# Altium PCB SteeringWheelBoard.PcbDoc
Units mil, origin at the board's own origin, x right, y up, seen from the top; angles counter-clockwise.
Board outline 2850 x 1785 mil, 2 copper layers (Top Layer, Bottom Layer); 13 components, 14 nets, 76 pads, 0 vias.
Unrouted connection lines stored in the file: 57.
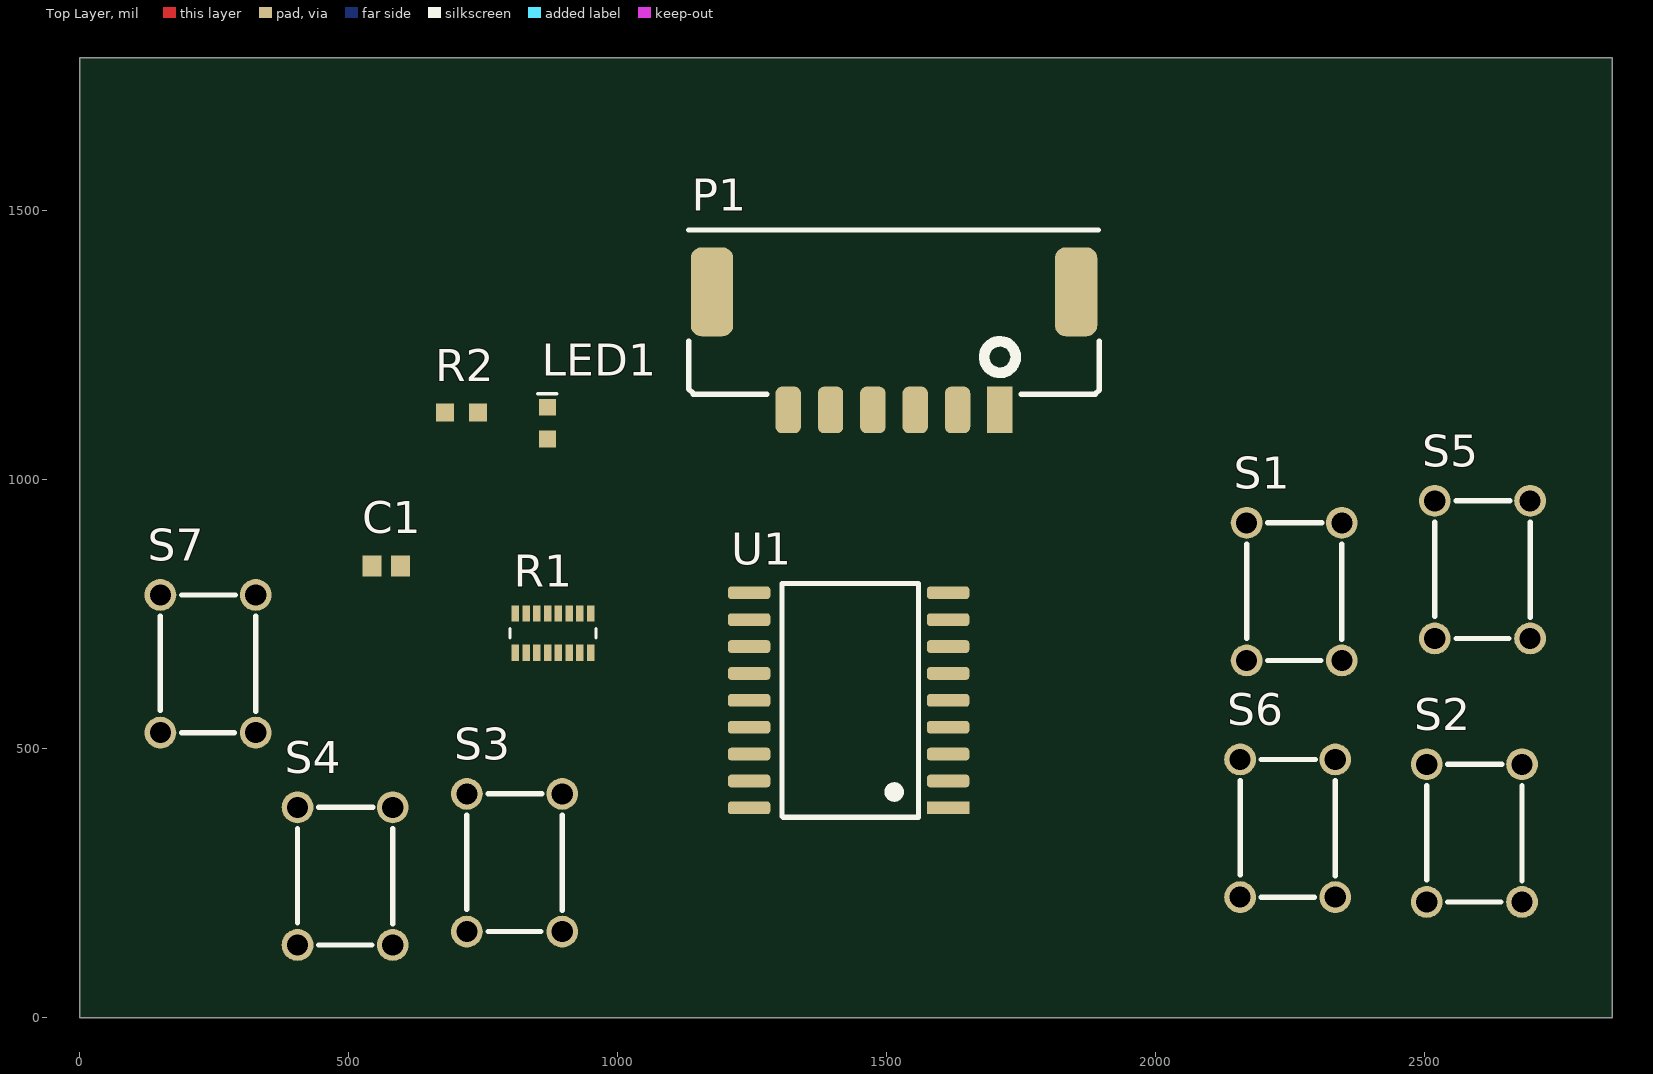
[diagram p0: Top Layer view]
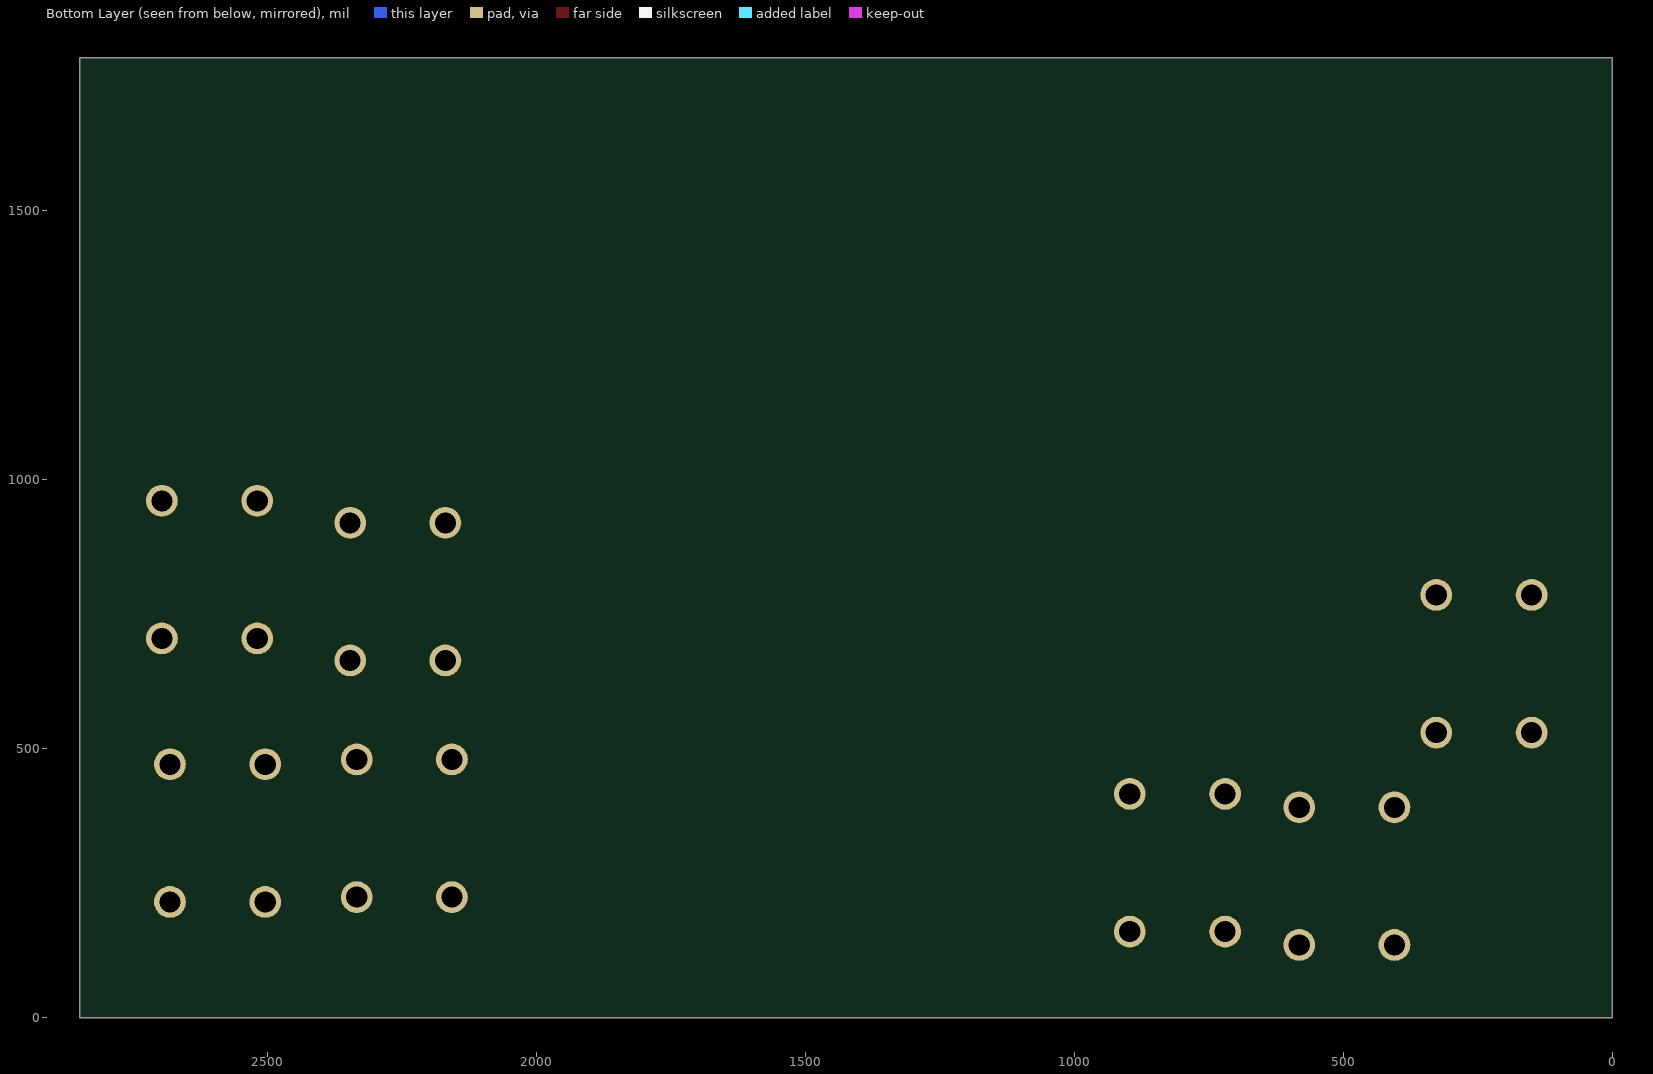
[diagram p1: Bottom Layer view, seen from below]

## Layer stack, top to bottom
Top Solder: solder mask 0.4, Solder Resist, Dk 3.5
Top Layer: signal copper 1.4
Dielectric 1: dielectric 12.6, FR-4, Dk 4.8
Bottom Layer: signal copper 1.4
Bottom Solder: solder mask 0.4, Solder Resist, Dk 3.5

## Board outline
0,0 2850,0 2850,1785 0,1785

## Design rules (kind name [scope] priority, off if disabled: settings)
Clearance [All] p1: gap=10 ignorepadtopadclearanceinfootprint=FALSE except(0: Arc-Hole Track-Hole SMDPad-Hole THPad-Hole Via-Hole Fill-Hole Poly-Hole Region-Hole Text-Hole; 6: Arc-SMDPad Track-SMDPad SMDPad-SMDPad)
PolygonConnect [All] p1: connectstyle=Relief reliefconductorwidth=10 reliefentries=4 polygonreliefangle="90 Angle" airgapwidth=10
RoutingVias [All] p1: holewidth=28 width=50 viastyle="Through Hole" minholewidth=28 minwidth=50 maxholewidth=28 maxwidth=50
SolderMaskExpansion [All] p1: expansion=4
Width [All] p1: maxlimit=10 minlimit=10 preferedwidth=10
30 further rules are at their usual default settings.

## Components (designator, comment, footprint, x,y, rotation, side; value= is the part's Value field where it differs from the comment)
C1 "CAP CER 0.1UF 50V 10% X7R 0603" "CAP, 0603" 570,840 r0 top
LED1 "LED RED CLEAR 2V 0603" LED_0603 870.39,1077.91 r90 top
P1 "DURA-CLIK" "CONN, 6POS DURA-CLIK VERT" 1711.22,1130 r180 top
R1 "RES ARRAY 10K OHM 5% 8RES" "RES ARRAY, 8 POS 1506" 880,715 r270 top value=Value
R2 "RES 510 OHM 5% 1/10W 0603" "RES, 0603" 710,1125 r0 top
S1 "SPST" "SW SPST-NO 6x6mm Via Hole" 2170,664.09 r0 top
S2 "SPST" "SW SPST-NO 6x6mm Via Hole" 2505,215 r0 top
S3 "SPST" "SW SPST-NO 6x6mm Via Hole" 720,160 r0 top
S4 "SPST" "SW SPST-NO 6x6mm Via Hole" 405,135 r0 top
S5 "SPST" "SW SPST-NO 6x6mm Via Hole" 2520,705 r0 top
S6 "SPST" "SW SPST-NO 6x6mm Via Hole" 2157.83,224.09 r0 top
S7 "SPST" "SW SPST-NO 6x6mm Via Hole" 150,530 r0 top
U1 "MCP23008" "IC 18SOIC" 1615,390 r90 top

## Footprints (in the part's own frame and the unit in brackets; to place one, negate y for a bottom-side part, rotate by r counter-clockwise, add the part's x,y. Pads: shape width x height; smd on the part's side, far side on the other; paste and mask are expansions set on the pad)
"CAP, 0603" [mm] "Chip Capacitor, 2-Leads, Body 1.60x0.81mm, IPC Medium Density"
  rect 0.9x1 smd mask+0.076: 1(-0.675,0) 2(0.675,0)
  body extent -0.87,-0.48 0.87,0.48, height 0.9
"CONN, 6POS DURA-CLIK VERT" [mm]
  rect 1.2x2.2 smd: 1(0,0)
  rrect50% 1.2x2.2 smd: 2(2,0) 3(4,0) 4(6,0) 5(8,0) 6(10,0)
  rrect50% 2x4.2 smd: 7(-3.6,-5.58) 7(13.6,-5.58)
  silkscreen extent -4.7,-8.5 14.7,-0.75, body extent -4.35,-8.54 14.25,0.61, height 7.97
"IC 18SOIC" [mm]
  rect 0.6x2 smd: 1(0,0)
  rrect50% 0.6x2 smd: 2(1.27,0) 3(2.54,0) 4(3.81,0) 5(5.08,0) 6(6.35,0) 7(7.62,0) 8(8.89,0) 9(10.16,0) 10(10.16,9.4) 11(8.89,9.4) 12(7.62,9.4) 13(6.35,9.4) 14(5.08,9.4) 15(3.81,9.4) 16(2.54,9.4) 17(1.27,9.4) 18(0,9.4)
  silkscreen extent -0.45,1.4 10.6,7.85, body extent -0.62,-0.38 10.72,9.78, height 2
LED_0603 [mm]
  rect 0.8x0.8 smd: 1(-0.05,0.01) 2(1.45,0.01)
  silkscreen extent 2.09,-0.43 2.09,0.48, body extent -0.1,-0.39 1.5,0.41, height 0.55
"RES ARRAY, 8 POS 1506" [mil]
  rect 30x14 smd: 1(-36.5,70) 2(-36.5,50) 3(-36.5,30) 4(-36.5,10) 5(-36.5,-10) 6(-36.5,-30) 7(-36.5,-50) 8(-36.5,-70) 9(36.5,-70) 10(36.5,-50) 11(36.5,-30) 12(36.5,-10) 13(36.5,10) 14(36.5,30) 15(36.5,50) 16(36.5,70)
  silkscreen extent -9,-80 9,80, body extent -15,-80 15,80, height 10
"RES, 0603" [mm] "Chip Resistor, 2-Leads, Body 1.60x0.80mm, IPC Medium Density"
  rect 0.85x0.85 smd: 1(-0.775,0) 2(0.775,0)
  body extent -0.8,-0.4 0.8,0.4, height 0.55
"SW SPST-NO 6x6mm Via Hole" [mm]
  round 1.5 hole 1: 1(0,0) 1(0,6.5) 2(4.5,0) 2(4.5,6.5)
  silkscreen extent 0,0 4.5,6.5

## Part data
C1: "0.10µF ±10% 50V Ceramic Capacitor X7R 0603 (1608 Metric)", Capacitance=0.1µF, Manufacturer 1="AVX Corporation", Manufacturer Part Number 1=06035C104KAT2A, Operating Temperature="-55°C ~ 125°C", Package / Case="0603 (1608 Metric)", Ratings=-, Supplier Part Number 1=478-5052-1-ND, Temperature Coefficient=X7R, Tolerance=±10%, Voltage=50V, ComponentLink1Description=http://datasheets.avx.com/X7RDielectric.pdf, ComponentLink1URL=http://datasheets.avx.com/X7RDielectric.pdf, Height - Seated (Max)=-, Lead Spacing=-, Lead Style=-, Mounting Type="Surface Mount, MLCC", Packaging="Cut Tape (CT)", Part Status=Active, Size / Dimension="0.063\" L x 0.032\" W (1.60mm x 0.81mm)", Supplier 1=Digi-Key, Thickness (Max)="0.035\" (0.90mm)"
LED1: "Red 631nm LED Indication - Discrete 2V 0603 (1608 Metric)", Color=Red, Current - Test=20mA, Lens Color=Colorless, Manufacturer="Wurth Electronics Inc.", Manufacturer Part Number=150060RS75000, Millicandela Rating=250mcd, Package / Case="0603 (1608 Metric)", Supplier Device Package=0603, Supplier Part Number 1=732-4978-1-ND, Voltage - Forward (Vf) (Typ)=2V, Category=Optoelectronics, ComponentLink1Description=http://katalog.we-online.de/led/datasheet/150060RS75000.pdf, ComponentLink1URL=http://katalog.we-online.de/led/datasheet/150060RS75000.pdf, Features=-, Height (Max)=0.80mm, Lens Style/Size="Rectangle with Flat Top, 1.10mm x 0.70mm", Lens Transparency=Clear, Mounting Type="Surface Mount", Packaging="Cut Tape (CT)", Part Status=Active, Pricing 1="1=0.21, 100=0.1617, 500=0.13964 (CAD)", RoHS="RoHS Compliant", Size / Dimension="1.60mm L x 0.80mm W", Stock 1=35521, Supplier 1=Digi-Key, Viewing Angle=140°, Wavelength - Dominant=625nm, Wavelength - Peak=630nm
P1: library part "CONN 6POS DURA-CLIK 0.079\"", "6 Positions Header, Shrouded Connector 0.079\" (2.00mm) Surface Mount, Vertical Tin", Current Rating=-, Insulation Color=Natural, Manufacturer=Molex, Manufacturer Part Number=5600200820, Supplier Part Number 1=WM10866CT-ND, Applications="Automotive, Industrial", Category="Connectors, Interconnects", ComponentLink1Description=http://www.molex.com/pdm_docs/sd/5600200220_sd.pdf, ComponentLink1URL=http://www.molex.com/pdm_docs/sd/5600200220_sd.pdf, Connector Type=Header, Contact Finish - Mating=Tin, Contact Finish - Post=Tin, Contact Finish Thickness - Mating=-, Contact Finish Thickness - Post=-, Contact Length - Mating=-, Contact Length - Post=-, Contact Material="Copper Alloy", Contact Shape=Square, Contact Type="Male Pin", Fastening Type="Latch Lock", Features="Solder Retention", Ingress Protection=-, Insulation Height="0.315\" (8.00mm)", Insulation Material="Polyamide (PA), Nylon", Mated Stacking Heights=9.3mm, Material Flammability Rating=-, Mounting Type="Surface Mount", Number of Positions=6, Number of Positions Loaded=All, Number of Rows=1, Operating Temperature=-, Overall Contact Length=-, Packaging="Cut Tape (CT)", Part Status=Active, Pitch - Mating="0.079\" (2.00mm)", Pricing 1="1=1.76, 10=1.542, 25=1.4512, 50=1.391, 100=1.3305, 250=1.20956 (CAD)", RoHS="RoHS Compliant", Row Spacing - Mating=-, Shrouding="Shrouded - 4 Wall", Stock 1=3826, Style="Board to Cable/Wire", Supplier 1=Digi-Key, Termination=Solder, Voltage Rating=-
R1: library part "RES ARRAY 10K OHM 5% 8RES EXB-2HV103JV", "RES ARRAY SMD 10K 5% 62.5mW 1506", Manufacturer="Panasonic Electronic Components", Manufacturer_Part_Number=EXB-2HV103JV, Operating Temperature="-55°C ~ 125°C", Package / Case="1506, Convex, Long Side Terminals", Power Per Element=62.5mW, Resistance (Ohms)=10k, Supplier Device Package=1506, Supplier Part Number 1=Y1103CT-ND, Temperature Coefficient=±200ppm/°C, Tolerance=±5%, Applications="Automotive AEC-Q200", C="Copyright (C) 2015 Accelerated Designs. All rights reserved", Category=Resistors, Circuit Type=Isolated, ComponentLink1Description=https://industrial.panasonic.com/cdbs/www-data/pdf/AOC0000/AOC0000C14.pdf, ComponentLink1URL=https://industrial.panasonic.com/cdbs/www-data/pdf/AOC0000/AOC0000C14.pdf, Copyright="Copyright (C) 2015 Accelerated Designs. All rights reserved", Height - Seated (Max)="0.022\" (0.55mm)", Manufacturer Part Number=EXB-2HV103JV, Mounting Type="Surface Mount", Packaging="Cut Tape (CT)", Part Status=Active, Pricing 1="1=0.43, 10=0.373, 25=0.2712, 50=0.1964, 100=0.1456, 250=0.11176, 500=0.08806, 1000=0.06096 (CAD)", RoHS="RoHS Compliant", Size / Dimension="0.150\" L x 0.063\" W (3.80mm x 1.60mm)", Stock 1=152779, Supplier 1=Digi-Key, Vendor=Panasonic
R2: "RES SMD 510 OHM 5% 1/10W 0603", Manufacturer 1=Yageo, Manufacturer Part Number 1=RC0603JR-07510RL, Operating Temperature="-55°C ~ 155°C", Package / Case="0603 (1608 Metric)", Power=1/10W, Resistance=510, Supplier Device Package=0603, Supplier Part Number 1=311-510GRCT-ND, Temperature Coefficient=±100ppm/°C, Tolerance=±5%, ComponentLink1Description=http://www.yageo.com/documents/recent/PYu-RC_Group_51_RoHS_L_7.pdf, ComponentLink1URL=http://www.yageo.com/documents/recent/PYu-RC_Group_51_RoHS_L_7.pdf, Composition="Thick Film", Failure Rate=-, Height - Seated (Max)="0.022\" (0.55mm)", Packaging="Cut Tape (CT)", Part Status=Active, Size / Dimension="0.063\" L x 0.031\" W (1.60mm x 0.80mm)", Supplier 1=Digi-Key
S1 S2 S3 S4 S5 S6 S7: library part "SW SPST-NO 15VDC@0.02A via hole", "Switch Tactile SPST 6x6x9.5mm 15VDC@0.02A Through Hole", Contact Rating @ Voltage="0.02A @ 15VDC", Illumination Type, Color=-, Manufacturer="Panasonic Electronic Components", Manufacturer Part Number=EVQ-PAC09K, Operating Force=100gf, Operating Temperature="-20°C ~ 70°C", Supplier Part Number 1=P8012S-ND, Actuator Height off PCB, Vertical=9.50mm, Actuator Length, Right Angle=-, Actuator Material=-, Actuator Orientation="Top Actuated", Actuator Type=Standard, Category=Switches, Circuit=SPST-NO, ComponentLink1Description=http://industrial.panasonic.com/cdbs/www-data/pdf/ATK0000/ATK0000CE10.pdf, ComponentLink1URL=http://industrial.panasonic.com/cdbs/www-data/pdf/ATK0000/ATK0000CE10.pdf, Features=-, Illumination=Non-Illuminated, Illumination Voltage (Nominal)=-, Ingress Protection=-, Mechanical Life="100,000 Cycles", Mounting Type="Through Hole", Outline="6.00mm x 6.00mm", Packaging=Bulk, Part Status=Active, Pricing 1="1=0.31, 10=0.303, 25=0.2932, 50=0.2828, 100=0.2671, 250=0.2514, 500=0.24094, 1000=0.18332, 5000=0.15189 (CAD)", RoHS="RoHS Compliant", Stock 1=30036, Supplier 1=Digi-Key, Switch Function=Off-Mom, Switch Travel=0.25mm, Termination Style="PC Pin"
U1: library part "IC I/O EXPANDER I2C 8B 18SOIC", "MCP23008 I/O Expander 8B+1Int 18P SOIC", Current - Output Source/Sink=25mA, Manufacturer="Microchip Technology", Manufacturer Part Number=MCP23008T-E/SO, Operating Temperature="-40°C ~ 125°C", Package / Case="18-SOIC (0.295\", 7.50mm Width)", Supplier Device Package=18-SOIC, Supplier Part Number 1=MCP23008T-E/SOCT-ND, Voltage - Supply="1.8 V ~ 5.5 V", Category="Integrated Circuits (ICs)", ComponentLink1Description=http://www.microchip.com/mymicrochip/filehandler.aspx?ddocname=en021920, ComponentLink1URL=http://www.microchip.com/mymicrochip/filehandler.aspx?ddocname=en021920, Features=POR, Interface=I²C, Interrupt Output=Yes, Mounting Type="Surface Mount", Number of I/O=8, Output Type=Push-Pull, Packaging="Cut Tape (CT)", Part Status=Active, Pricing 1="1=1.62, 25=1.3548, 100=1.2431 (CAD)", RoHS="RoHS Compliant", Stock 1=5607, Supplier 1=Digi-Key

## Nets (pads, with @x,y where several pads share a name; then routed paths per layer and width w, separated by ;. In a path a pad name is that pad's centre, name@x,y a point inside that pad or via, vN(x,y) a via of type N, cw(c..) or ccw(c..) an arc to the next point about the centre after c; other vN are vias at no path point)
+3V3: C1.1 P1.1 R1.10 R1.11 R1.12 R1.13 R1.14 R1.15 R1.16 U1.6 U1.18
BMS_FAULT_SIGNAL: LED1.1 U1.10
CRUISE_CONTROL_SPEED_DECREASE: R1.6 S6.1 U1.12
CRUISE_CONTROL_SPEED_INCREASE: R1.5 S5.1 U1.13
CRUISE_CONTROL_TOGGLE: R1.4 S4.1 U1.14
GND: C1.2 P1.5 P1.6 R2.2 S1.2 S2.2 S3.2 S4.2 S5.2 S6.2 S7.2 U1.3 U1.4 U1.5 U1.9
GPIO_INTERRUPT: P1.2 U1.8
GPIO_SCL: P1.3 U1.1
GPIO_SDA: P1.4 U1.2
HORN: R1.7 S7.1 U1.11
LEFT_TURN_SIGNAL: R1.2 S2.1 U1.16
NetLED1_2: LED1.2 R2.1
PUSH_TO_TALK_INPUT: R1.3 S3.1 U1.15
RIGHT_TURN_SIGNAL: R1.1 S1.1 U1.17
pads on no net: P1.7 R1.8 R1.9 U1.7